# Altium PCB PCB1.PcbDoc
Units mm, origin at the board's own origin, x right, y up, seen from the top; angles counter-clockwise.
Board outline 143.53 x 16 mm, 2 copper layers (Component Side, Bottom Layer), stack 0.418 mm thick; 2 components, 14 nets, 56 pads, 42 vias.
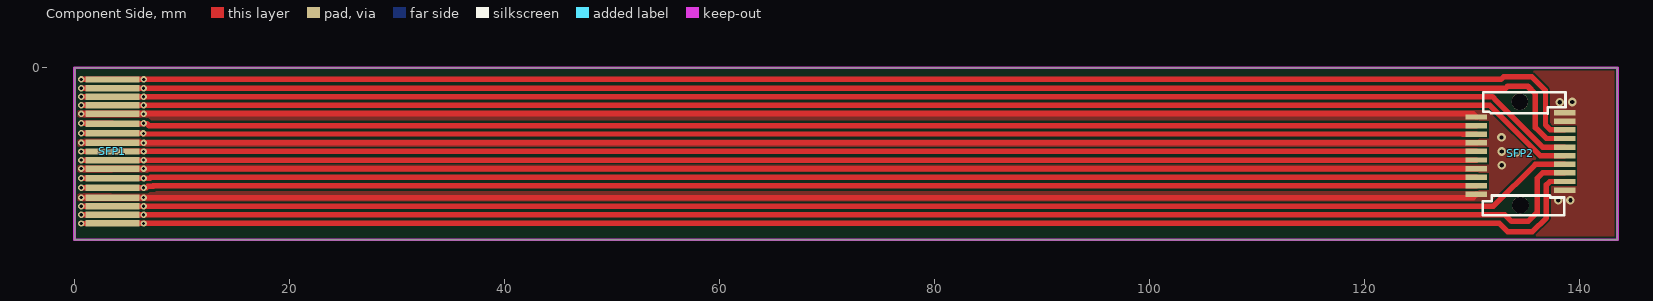
[diagram p0: Component Side view]
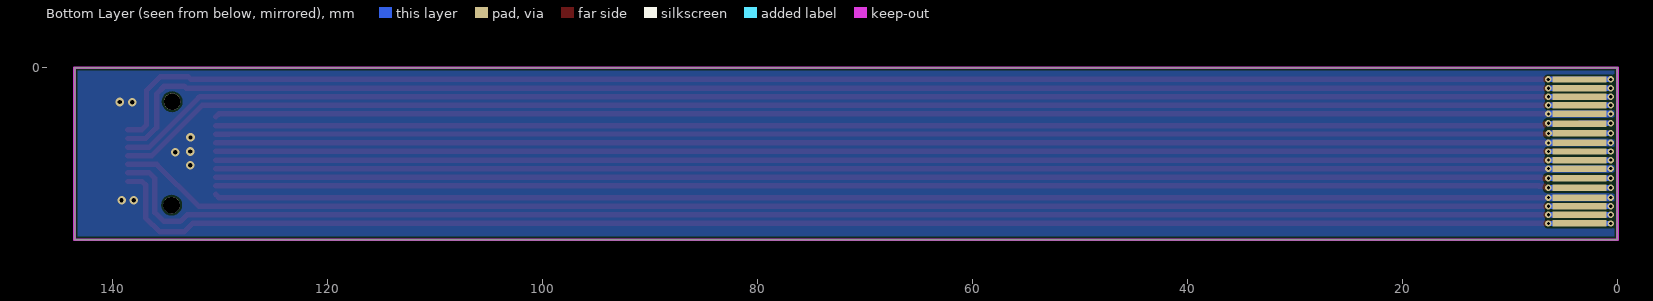
[diagram p1: Bottom Layer view, seen from below]

## Layer stack, top to bottom
Top Solder: solder mask 0.0063, Solder Resist, Dk 3.5
Component Side: signal copper 0.009
Dielectric 1: core 0.4, Polyimid, Dk 3.4
Bottom Layer: signal copper 0.009
Solder Side: solder mask 0.0063, Solder Resist, Dk 3.5

## Board outline
0,-16 0,0 143.526,0 143.526,-16

## Design rules (kind name [scope] priority, off if disabled: settings)
Clearance Clearance_1 [(InDifferentialPairClass('All Differential Pairs')) and not (InPadClass('All Pads')) vs InNet('GND')] p1: gap=0.254
Clearance [All] p2: gap=0.178
Clearance Clearance_2 [InNamedPolygon('NONET_L01_P018') vs not InNet('GND')] p3: gap=0.254
DiffPairsRouting [All] p1: maxlimit=0.254 minlimit=0.254 mostfreqgap=0.254 toplayer_minwidth=0.508 toplayer_maxwidth=0.508 toplayer_prefwidth=0.508 bottomlayer_minwidth=0.508 bottomlayer_maxwidth=0.508 bottomlayer_prefwidth=0.508 maxuncoupledlength=12.7
HoleSize [All] p1: absolutevalues=TRUE maxlimit=100 minlimit=0.025 maxpercent=80.000 minpercent=20.000
MinimumSolderMaskSliver [All] p1: minsoldermaskwidth=0.076
PlaneConnect [All] p1: planeconnectstyle=Direct reliefexpansion=0.508 reliefentries=4 reliefconductorwidth=0.254 reliefairgap=0.254
PolygonConnect [All] p1: connectstyle=Direct reliefconductorwidth=0.254 reliefentries=4 polygonreliefangle="90 Angle" airgapwidth=0.254
RoutingVias [All] p1: holewidth=0.711 width=1.27 viastyle="Through Hole" minholewidth=0.711 minwidth=1.27 maxholewidth=0.711 maxwidth=1.27
SilkToSilkClearance [All] p1: silktosilkclearance=0
SilkToSolderMaskClearance [IsPad] p1: minsilkscreentomaskgap=0 clearancetoexposedcopper=TRUE
SolderMaskExpansion [All] p1: expansion=0.102
Width [All] p1: maxlimit=2.54 minlimit=0.178 preferedwidth=0.254
24 further rules are at their usual default settings.

## Classes and differential pairs
differential pair TD: +TD_P -TD_N
differential pair RD: +RD_P -RD_N

## Components (designator, comment, footprint, x,y, rotation, side; value= is the part's Value field where it differs from the comment)
SFP1 "SFP PCB connector" "SFP PCB CON SOLDER" 3.516,-11 r90 top
SFP2 "SFP receptacle (no cage)" "SFP RECEPTACLE (NO CAGE)" 134.506,-7.978 r90 top

## Footprints (in the part's own frame and the unit in brackets; to place one, negate y for a bottom-side part, rotate by r counter-clockwise, add the part's x,y. Pads: shape width x height; smd on the part's side, far side on the other; paste and mask are expansions set on the pad)
"SFP PCB CON SOLDER" [mm]
  rect 0.6x5 smd far side: 2(-3.49,0) 3(-2.69,0) 4(-1.89,0) 5(7.5,0) 6(8.3,0) 7(9.1,0) 8(9.9,0) 11(6.7,0) 12(5.8,0) 13(4.9,0) 14(4,0) 15(3.2,0) 16(2.4,0) 17(1.6,0) 18(0.71,0) 19(-0.19,0) 20(-1.09,0)
  rect 0.6x5 smd: 2(-3.49,0) 3(-2.69,0) 4(-1.89,0) 5(7.5,0) 6(8.3,0) 7(9.1,0) 8(9.9,0) 11(6.7,0) 12(5.8,0) 13(4.9,0) 14(4,0) 15(3.2,0) 16(2.4,0) 17(1.6,0) 18(0.71,0) 19(-0.19,0) 20(-1.09,0)
"SFP RECEPTACLE (NO CAGE)" [mm]
  rect 0.5x2 smd: 1(-3.412,-4.1) 2(-2.612,-4.1) 3(-1.812,-4.1) 4(-1.012,-4.1) 5(-0.212,-4.1) 6(0.588,-4.1) 7(1.388,-4.1) 8(2.188,-4.1) 9(2.988,-4.1) 10(3.788,-4.1) 11(3.388,4.1) 12(2.588,4.1) 13(1.788,4.1) 14(0.988,4.1) 15(0.188,4.1) 16(-0.612,4.1) 17(-1.412,4.1) 18(-2.212,4.1) 19(-3.012,4.1) 20(-3.812,4.1)
  round 1.55 hole 1.55: 35(4.813,0.05) 36(-4.812,0)
  silkscreen extent -5.76,-4.2 5.69,3.5

## Via types
v1: diameter 0.6, hole 0.3, Component Side to Bottom Layer, tented both sides, 34 vias
v2: diameter 0.8, hole 0.4, Component Side to Bottom Layer, tented both sides, 8 vias

## Nets (pads, with @x,y where several pads share a name; then routed paths per layer and width w, separated by ;. In a path a pad name is that pad's centre, name@x,y a point inside that pad or via, vN(x,y) a via of type N, cw(c..) or ccw(c..) an arc to the next point about the centre after c; other vN are vias at no path point)
GND: SFP1.11 SFP1.14 SFP1.17 SFP1.20 SFP2.1 SFP2.9 SFP2.10 SFP2.11 SFP2.14 SFP2.17 SFP2.20 | length 546.7
  Component Side w0.508: v1(0.61,-12.09) 3.516,-12.09 130.106,-12.09 SFP2.20 ; v1(0.61,-9.39) 3.506,-9.39 SFP2.17 ; v1(0.61,-4.3) SFP1.11@3.516,-4.3 ; v1(0.62,-7) 3.516,-7 130.396,-7 SFP2.14 ; v1(6.42,-4.3) SFP1.11@3.516,-4.3 ; SFP2.11 130.116,-4.3 SFP1.11@3.516,-4.3
  Bottom Layer w0.508: v1(0.61,-12.09) v1(6.42,-12.09) ; v1(0.61,-9.39) v1(6.42,-9.39) ; v1(0.61,-4.3) 3.516,-4.3 v1(6.42,-4.3) ; SFP1.14@1.69,-7.02 1.71,-7 v1(0.62,-7) v1(6.42,-7)
  other v2: 138.026,-12.33 139.156,-12.33 132.756,-9.09 134.166,-7.86 132.756,-7.8 132.746,-6.49 138.166,-3.21 139.336,-3.2
LOS: SFP1.8 SFP2.8 | length 147.8
  Component Side w0.508: v1(0.62,-1.09) 0.63,-1.1 3.516,-1.1 132.686,-1.1 132.936,-0.85 135.576,-0.85 136.836,-2.11 136.836,-5.33 137.296,-5.789 SFP2.8
  Bottom Layer w0.508: v1(0.62,-1.09) 0.63,-1.1 3.516,-1.1 v1@6.42,-1.1
  other v1: 6.43,-1.09
MOD_DEF0: SFP1.6 SFP2.6 | length 145.8
  Component Side w0.508: v1(0.61,-2.7) 3.516,-2.7 131.886,-2.7 132.266,-3.08 ; 132.231,-3.045 136.576,-7.39 SFP2.6
  Bottom Layer w0.508: v1(0.61,-2.7) 3.516,-2.7 v1(6.42,-2.7)
MOD_DEF1: SFP1.5 SFP2.5 | length 148.7
  Component Side w0.508: v1(0.61,-3.5) SFP1.5@3.516,-3.5 ; v1(6.42,-3.5) SFP1.5@3.516,-3.5 ; SFP2.5 136.346,-8.19 131.656,-3.5 SFP1.5@3.516,-3.5
  Bottom Layer w0.508: v1(0.61,-3.5) 3.516,-3.5 v1(6.42,-3.5)
MOD_DEF2: SFP1.4 SFP2.4 | length 145.4
  Component Side w0.508: v1(0.61,-12.89) 3.516,-12.89 131.986,-12.89 135.886,-8.99 SFP2.4
  Bottom Layer w0.508: v1(0.61,-12.89) v1(6.42,-12.89)
RATE_SEL: SFP1.7 SFP2.7 | length 147.7
  Component Side w0.508: v1(0.61,-1.91) 3.506,-1.91 SFP1.7@3.516,-1.9 ; SFP1.7@3.506,-1.9 133.146,-1.9 133.316,-1.73 135.186,-1.73 135.896,-2.44 135.896,-5.57 136.916,-6.59 SFP2.7
  Bottom Layer w0.508: v1(0.61,-1.91) 3.506,-1.91 3.516,-1.9 v1@6.41,-1.9
  other v1: 6.42,-1.91
RD_N: SFP1.12 SFP2.12 | length 135.4
  Component Side w0.508: v1(0.62,-5.18) 3.496,-5.18 3.516,-5.2 v1@6.42,-5.2 ; 6.72,-5.2 6.929,-5.409 129.133,-5.409 129.152,-5.39 SFP2.12
  Bottom Layer w0.508: v1(0.62,-5.18) 3.496,-5.18 3.516,-5.2 v1@6.4,-5.2
  other v1: 6.42,-5.18
RD_P: SFP1.13 SFP2.13 | length 135.6
  Component Side w0.508: v1@0.62,-6.09 6.37,-6.09 v1(6.4,-6.12) ; v1@6.4,-6.171 129.133,-6.171 129.152,-6.19 SFP2.13
  Bottom Layer w0.508: v1(0.62,-6.11) SFP1.13@3.506,-6.11 ; SFP1.13@3.516,-6.1 v1@6.38,-6.1
TD_N: SFP1.19 SFP2.19 | length 135.8
  Component Side w0.508: v1(0.61,-11.17) SFP1.19@3.496,-11.17 ; SFP1.19@3.516,-11.19 6.66,-11.19 6.798,-11.052 7.316,-11.052 7.397,-10.971 ; 7.316,-10.971 129.133,-10.971 129.152,-10.99 SFP2.19
  Bottom Layer w0.508: v1(0.61,-11.17) v1(6.42,-11.17)
TD_P: SFP1.18 SFP2.18 | length 135.6
  Component Side w0.508: v1(0.61,-10.29) 3.516,-10.29 7,-10.29 7.081,-10.209 129.133,-10.209 129.152,-10.19 SFP2.18
  Bottom Layer w0.508: v1(0.61,-10.29) v1(6.42,-10.29)
TX_DISABLE: SFP1.3 SFP2.3 | length 147.9
  Component Side w0.508: v1(0.61,-13.69) SFP1.3@3.516,-13.69 ; SFP1.3@3.39,-13.69 133.066,-13.69 133.686,-14.31 135.226,-14.31 136.056,-13.48 136.056,-10.31 136.576,-9.79 SFP2.3
  Bottom Layer w0.508: v1(0.61,-13.69) v1(6.42,-13.69)
TX_FAULT: SFP1.2 SFP2.2 | length 147.9
  Component Side w0.508: v1(0.61,-14.5) SFP1.2@3.506,-14.5 ; SFP1.2@3.506,-14.49 132.536,-14.49 133.306,-15.26 135.626,-15.26 136.916,-13.97 136.916,-10.91 137.236,-10.59 SFP2.2
  Bottom Layer w0.508: v1(0.61,-14.5) v1(6.42,-14.5)
VCCR: SFP1.15 SFP2.15 | length 138.5
  Component Side w0.508: v1(0.61,-7.8) v1(6.42,-7.8) ; SFP1.15@3.516,-7.79 SFP2.15
  Bottom Layer w0.508: v1(0.61,-7.8) 3.516,-7.8 v1(6.42,-7.8)
VCCT: SFP1.16 SFP2.16 | length 135.6
  Component Side w0.254: SFP2.16@130.396,-8.6 SFP2.16
  Component Side w0.508: v1(0.61,-8.6) 3.516,-8.6 SFP2.16@130.396,-8.6
  Bottom Layer w0.508: v1(0.61,-8.6) v1(6.42,-8.6)
pads on no net: SFP2.35 SFP2.36

## Polygon pours and split planes (outlines as drawn)
GND on Component Side "GND_L01_P022" (solid, remove dead copper, pour order 22): 0,-16 0,0 143.526,0 143.526,-16
GND on Bottom Layer "GND_L02_P023" (solid, remove dead copper, pour order 23): 0,-16 0,0 143.526,0 143.526,-16

## Keep-outs
Keep-Out Layer:
  the board outline again, w0.254